# Altium PCB PCI_ASTROPIX_carrier.PcbDoc (part 1 of 2)
Units mil, origin at the board's own origin, x right, y up, seen from the top; angles counter-clockwise.
Board outline 2019.69 x 2347.68 mil, 4 copper layers (Top Layer, gnd, HV_vss, Bottom Layer); 70 components, 61 nets, 417 pads, 93 vias.
Unrouted connection lines stored in the file: 4.
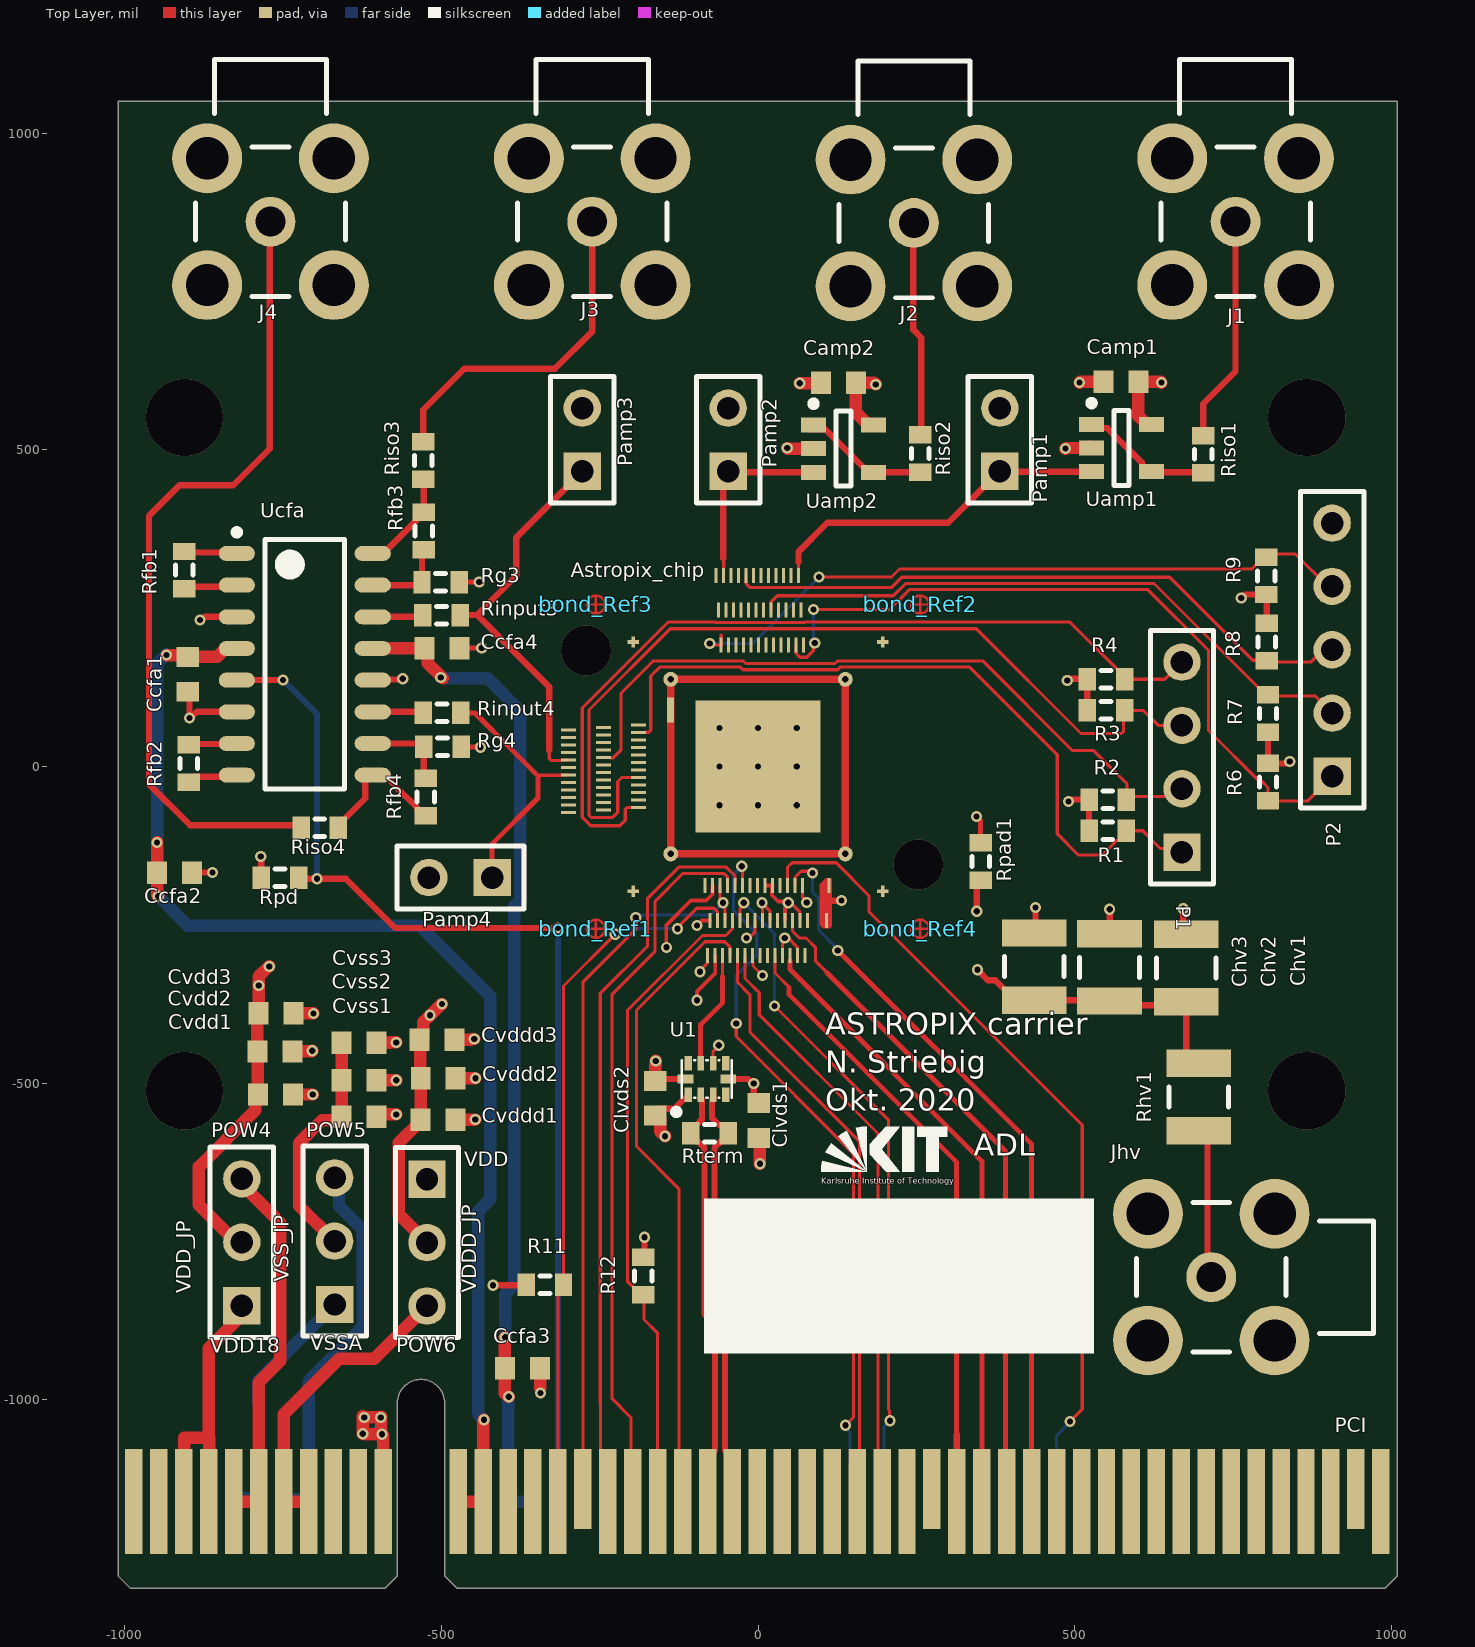
[diagram p0: Top Layer view]
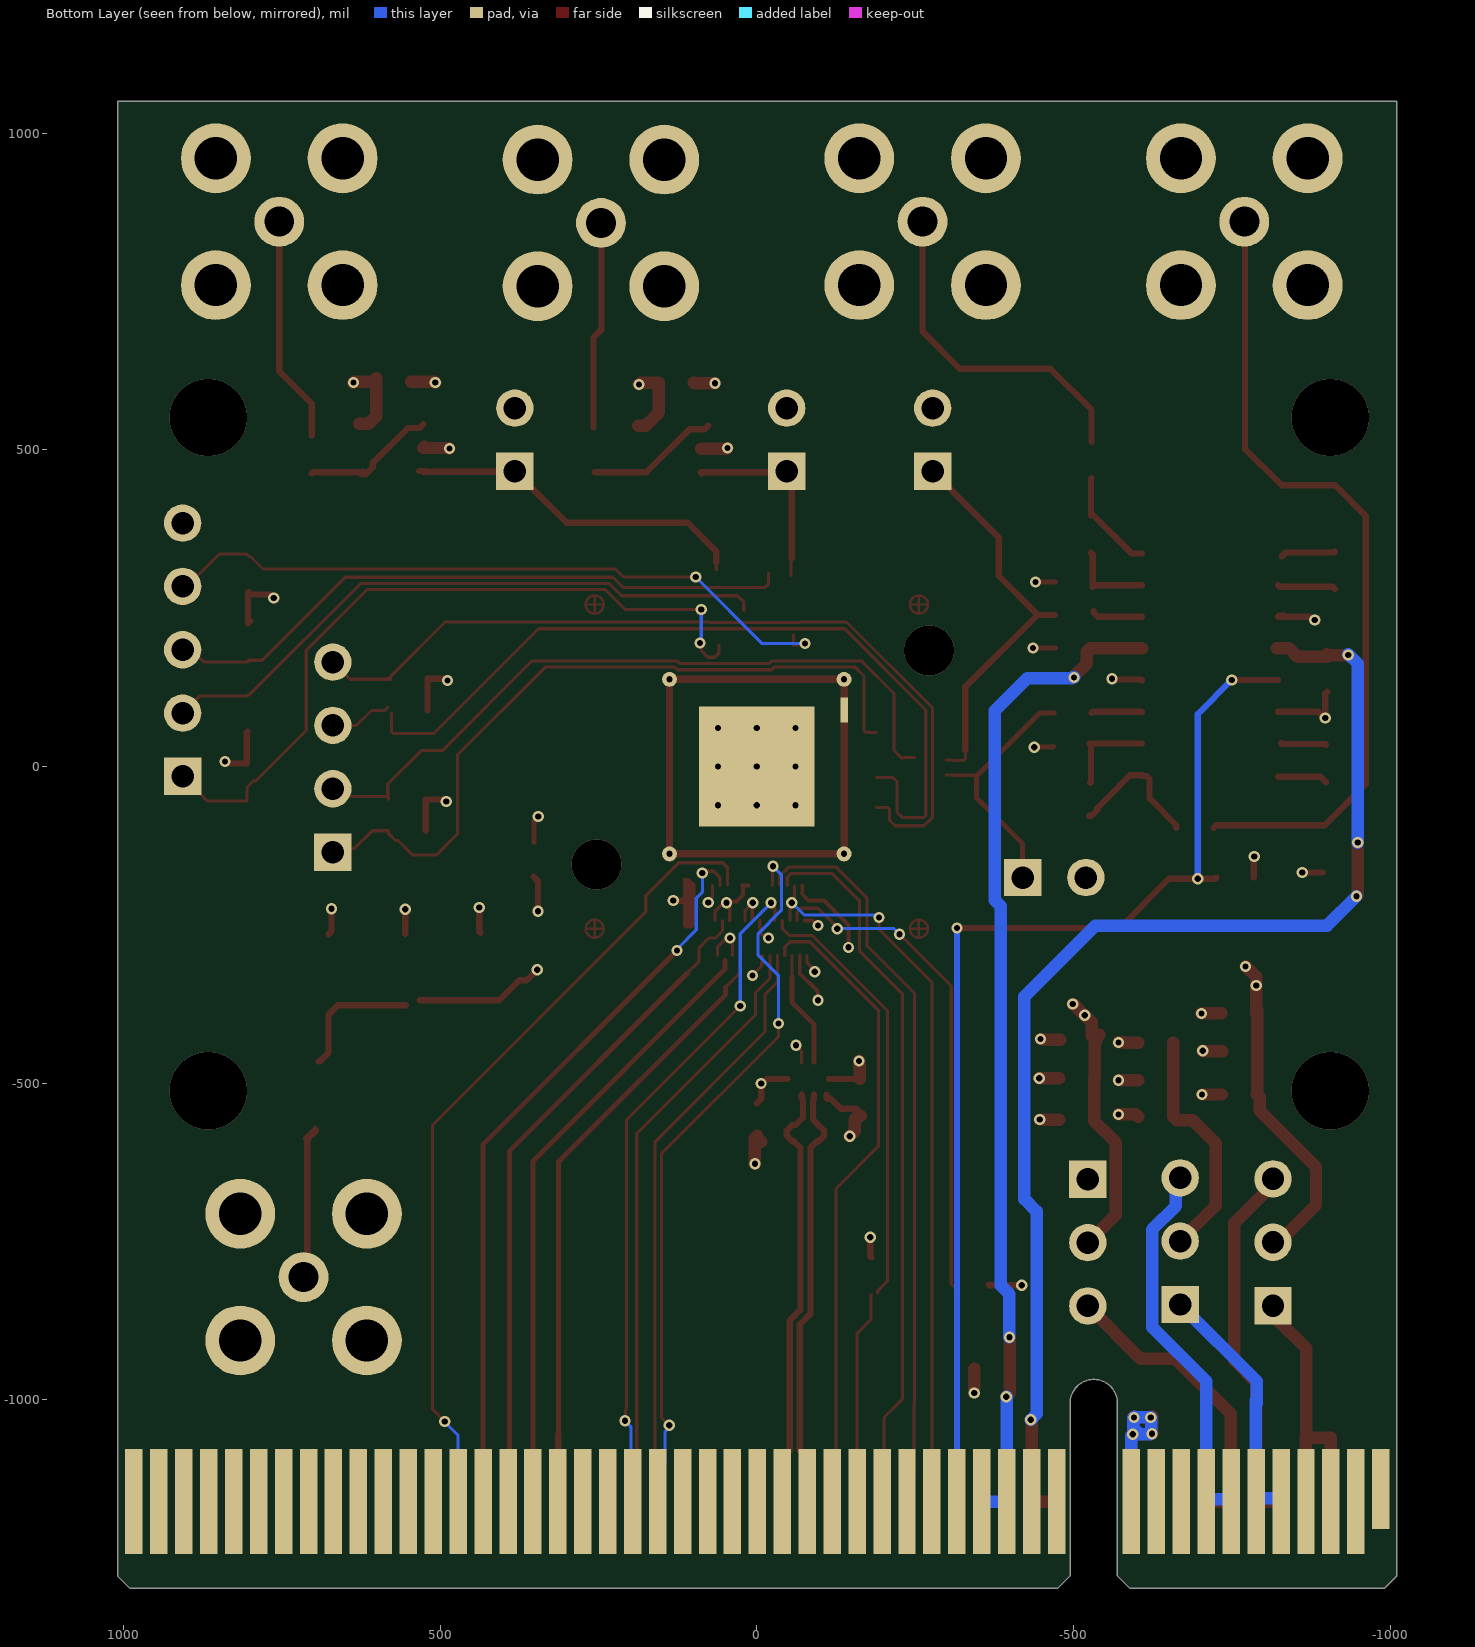
[diagram p1: Bottom Layer view, seen from below]
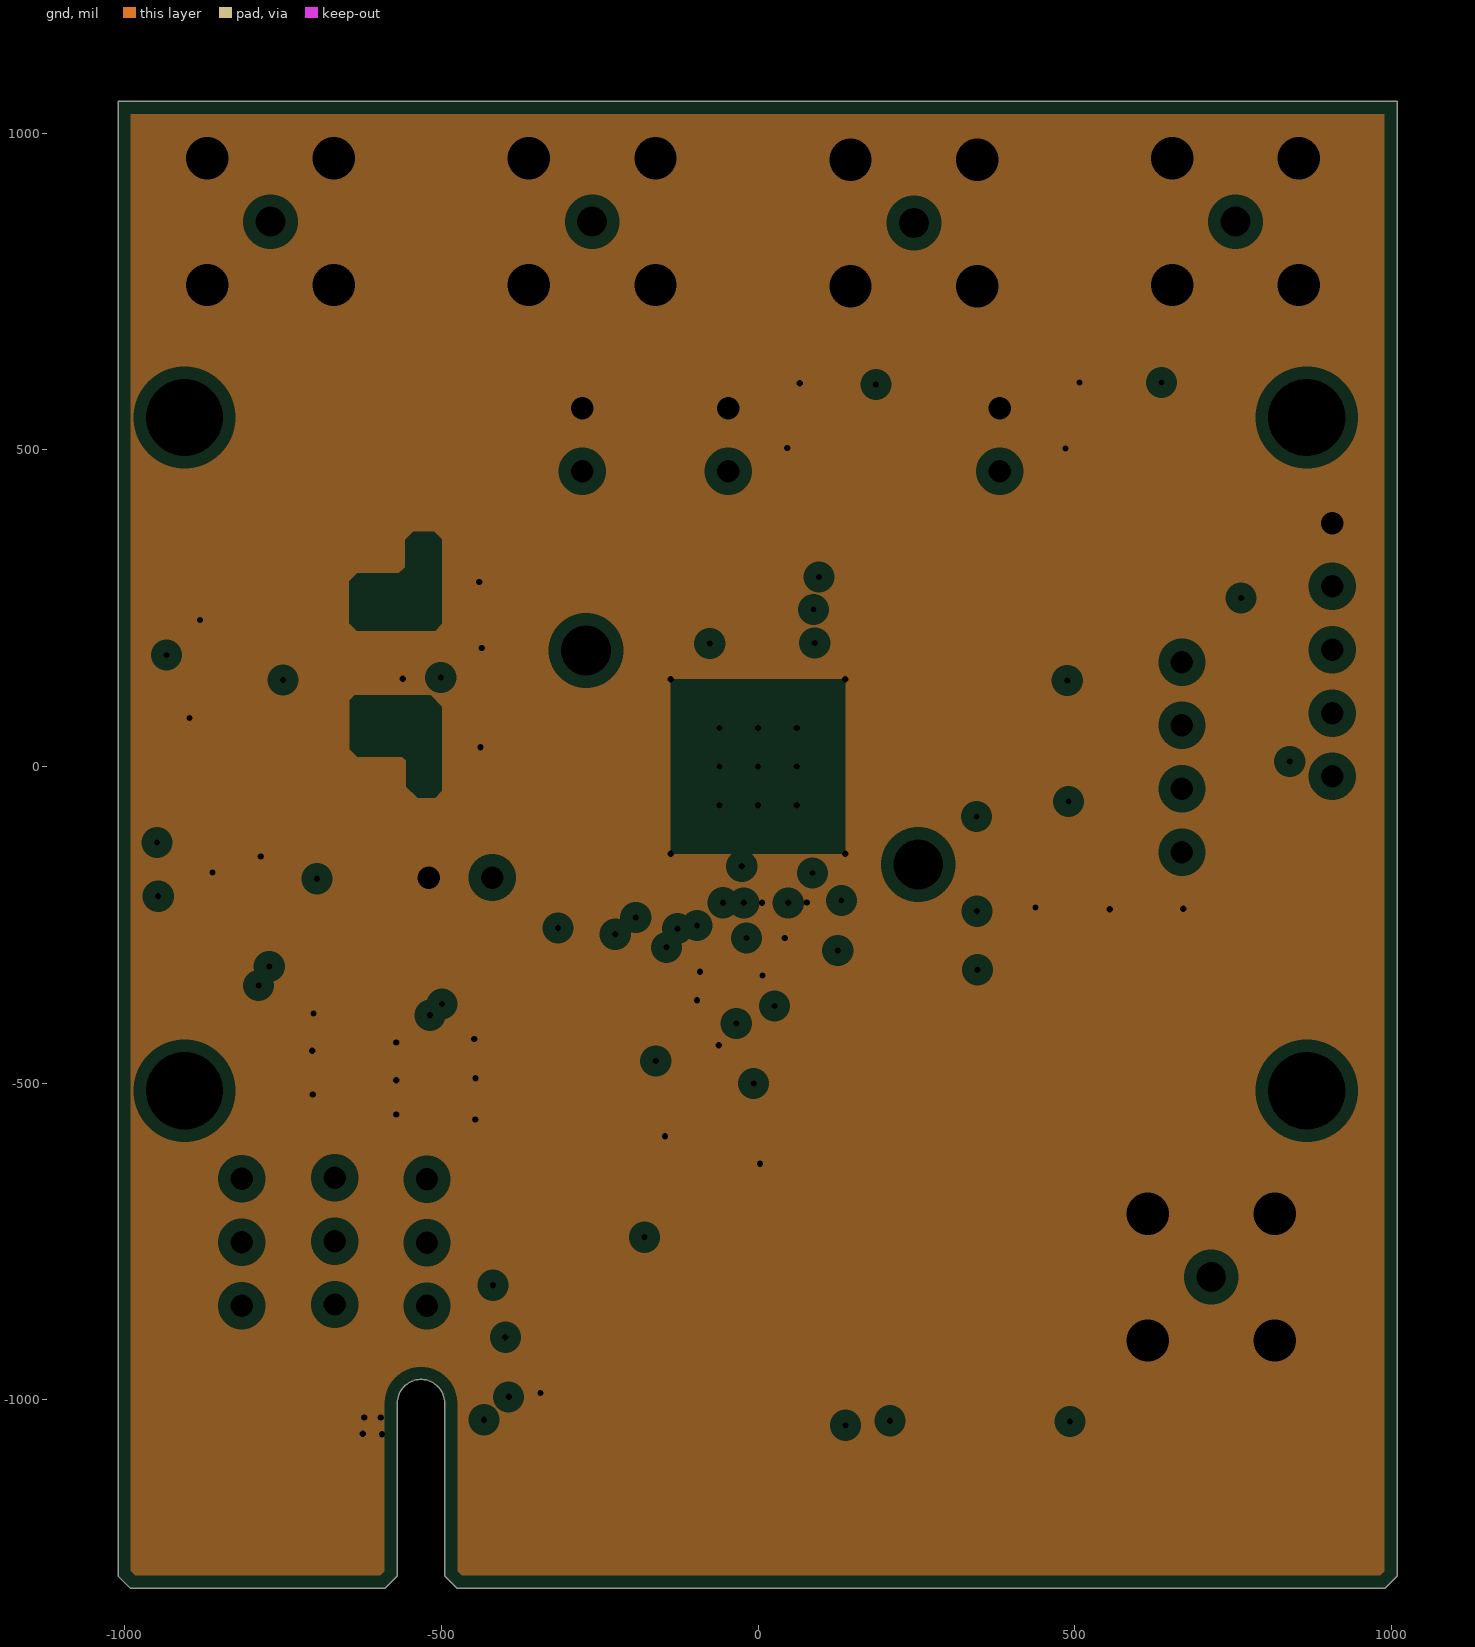
[diagram p2: gnd, clearances drawn from the general rule]
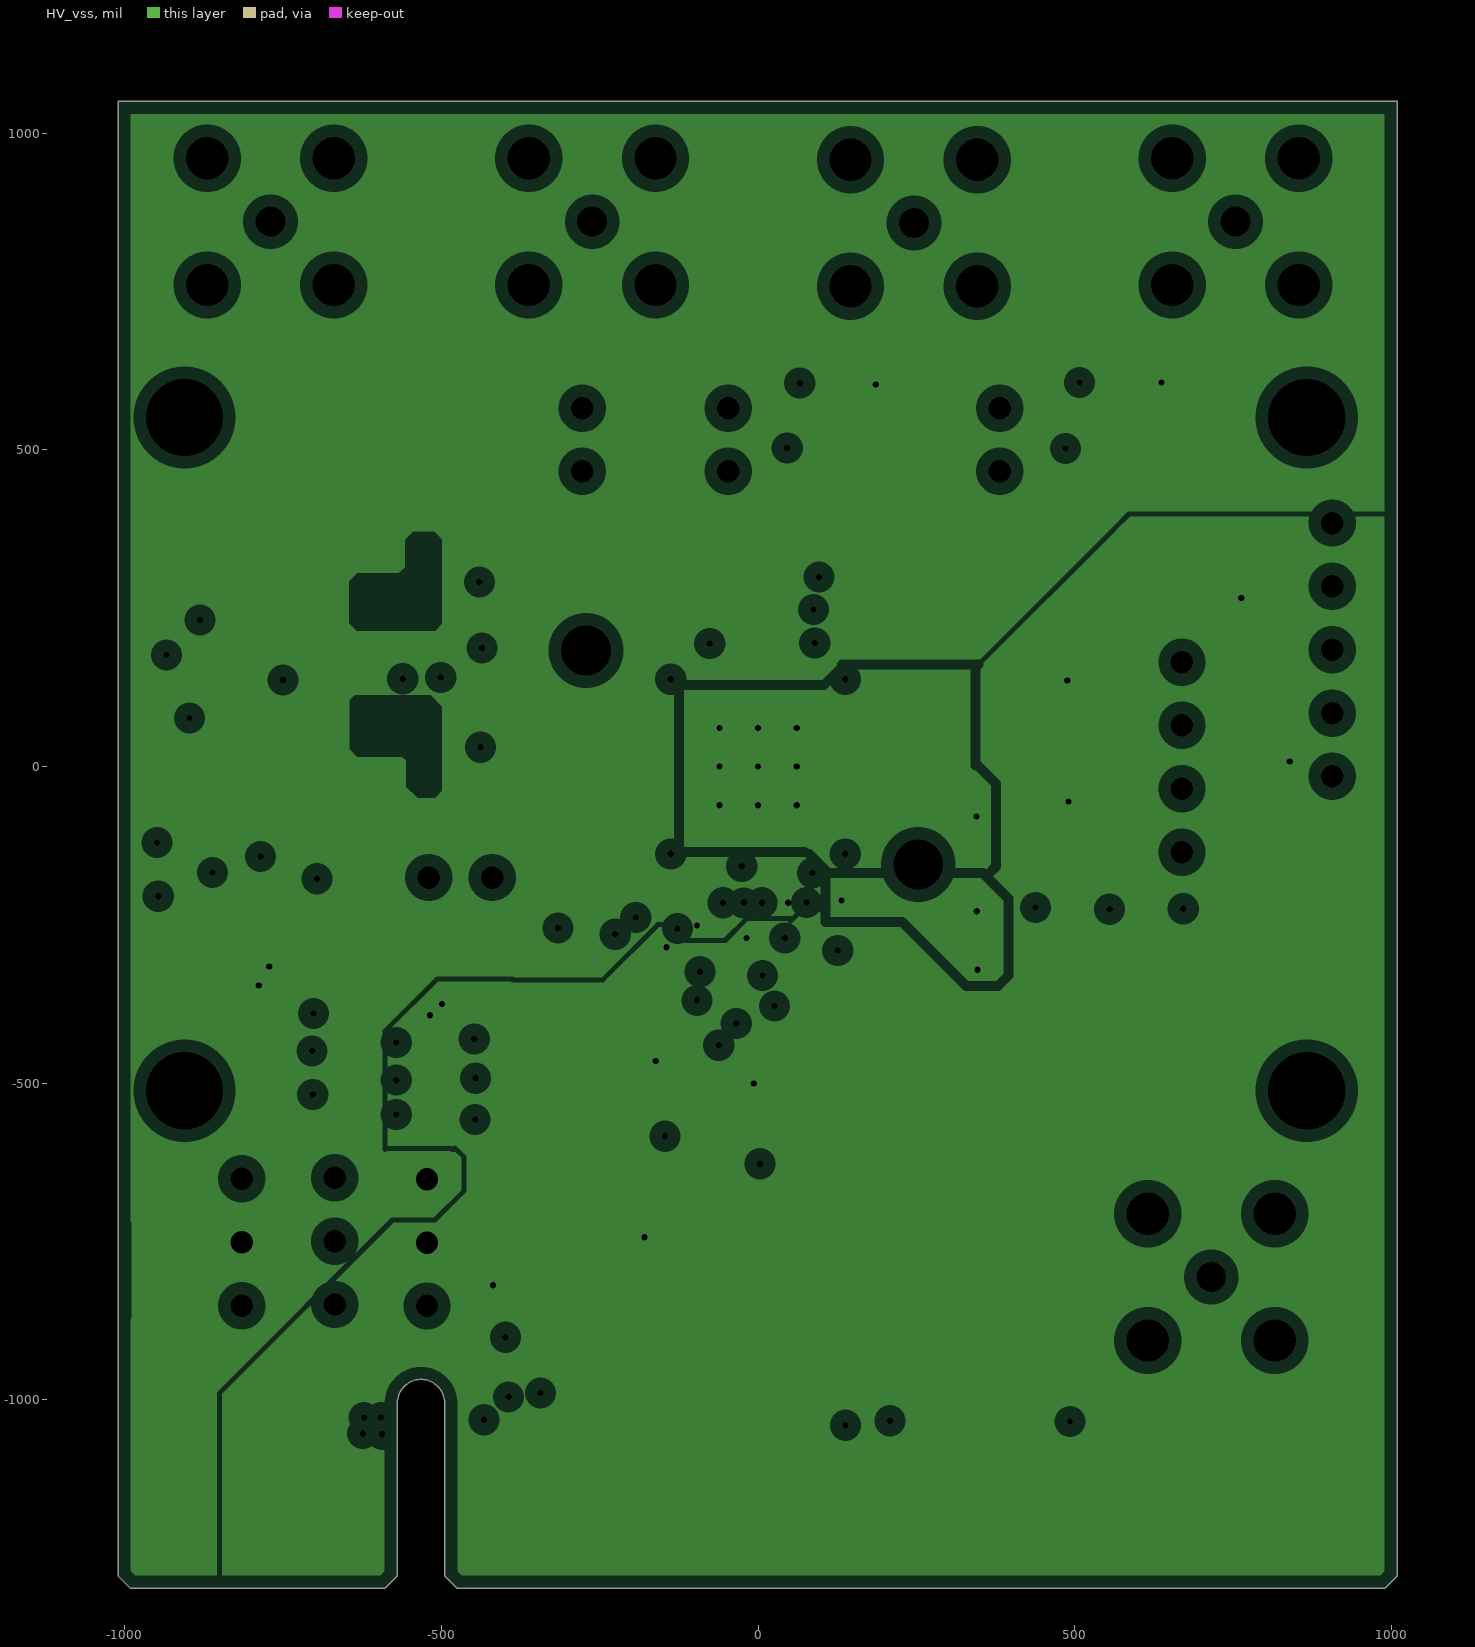
[diagram p3: HV_vss, clearances drawn from the general rule]

## Layer stack, top to bottom
Top Solder: solder mask 0.4, Solder Resist, Dk 3.5
Top Layer: signal copper 1.4
Dielectric 1: dielectric 12.6, FR-4, Dk 4.8
gnd: plane copper 1.4, net gnd
Dielectric2: dielectric 12.6, FR-4, Dk 4.8
HV_vss: plane copper 1.4, net (Multiple Nets)
Dielectric3: dielectric 12.6, FR-4, Dk 4.8
Bottom Layer: signal copper 1.4
Bottom Solder: solder mask 0.4, Solder Resist, Dk 3.5

## Board outline
-1010.43,-1277.8 -990.75,-1297.48 -589.17,-1297.48 -569.49,-1277.8 -569.49,-1005 cw(c-532.09,-1005) -494.69,-1005 -494.69,-1277.8 -475,-1297.48 989.57,-1297.48 1009.25,-1277.8 1009.25,-795.51 1009.25,1050.2 -1010.43,1050.2 -1010.43,-867.36

## Design rules (kind name [scope] priority, off if disabled: settings)
Clearance Clearance_hv [InNetClass('HV')] p1: gap=11.81 ignorepadtopadclearanceinfootprint=FALSE except(19.68: Arc-Arc Arc-Track Track-Track)
Clearance Clearance_differentnet [All] p2: gap=4.92 ignorepadtopadclearanceinfootprint=FALSE except(6.69: SMDPad-SMDPad SMDPad-THPad SMDPad-Via THPad-THPad THPad-Via Via-Via)
Clearance Clearance_samenet [All] p3: gap=4.92 ignorepadtopadclearanceinfootprint=FALSE except(0: Arc-Fill Arc-Poly Arc-Region Track-Fill Track-Poly Track-Region SMDPad-Fill SMDPad-Poly SMDPad-Region THPad-Fill THPad-Poly THPad-Region Via-Fill Via-Poly Via-Region Fill-Fill Fill-Poly Fill-Region Poly-Poly Poly-Region Region-Region; 6.69: SMDPad-SMDPad SMDPad-THPad SMDPad-Via THPad-THPad THPad-Via Via-Via)
ComponentClearance [All] p1: gap=0 collisioncheckmode=3 verticalgap=0 showdistances=FALSE
DiffPairsRouting [InDifferentialPairClass('Diffpair')] p1: maxlimit=7.87 minlimit=4.92 mostfreqgap=5.91 toplayer_minwidth=3.94 toplayer_maxwidth=11.81 toplayer_prefwidth=9.84 bottomlayer_minwidth=3.94 bottomlayer_maxwidth=11.81 bottomlayer_prefwidth=9.84 maxuncoupledlength=19.68
FabricationTestPointUsage FabricationTestPointUsage_1 [All] p1: valid=0 allowmultiple=FALSE
FabricationTestpoint FabricationTestpoint_1 [All] p1: side=3 testpointundercomponent=TRUE minsize=40 maxsize=100 preferedsize=60 minholesize=0 maxholesize=40 preferedholesize=32 testpointgrid=1 allowsidetop=TRUE allowsidebottom=TRUE usegrid=TRUE gridtolerance=0.01
HoleSize [All] p1: absolutevalues=TRUE maxlimit=236.22 minlimit=11.81 maxpercent=80.000 minpercent=20.000
HoleSize FabricationTestpoint [All] p2 off: absolutevalues=TRUE maxlimit=100 minlimit=1 maxpercent=80.000 minpercent=20.000
HoleSize FabricationTestPointUsage [All] p3 off: absolutevalues=TRUE maxlimit=100 minlimit=1 maxpercent=80.000 minpercent=20.000
MatchedLengths MatchedLengths_Within_diff [All] p1: tolerance=0.79 checknetsindiffpair=TRUE checkdiffpairvsdiffpair=FALSE checkxsignals=FALSE checkothers=FALSE
MatchedLengths MatchedLengths_all_diff [InDifferentialPairClass('FMC_LAxx')] p2: tolerance=3.94 checknetsindiffpair=FALSE checkdiffpairvsdiffpair=TRUE checkxsignals=TRUE checkothers=TRUE
MinimumAnnularRing [All] p1: minimumring=10
PlaneClearance [All] p1: clearance=19.68
PlaneConnect [All] p1: planeconnectstyle=Direct reliefexpansion=15.75 reliefentries=4 reliefconductorwidth=5.91 reliefairgap=5.91
PolygonConnect [All] p1: connectstyle=Relief reliefconductorwidth=5.91 reliefentries=4 polygonreliefangle="90 Angle" airgapwidth=10
RoomDefinition PCI_ASTROPIX_carrier [InComponentClass('PCI_ASTROPIX_carrier')] p1: confinementstyle=ConfineIn formatcopy=TRUE lockcomponents=FALSE outline 1054.28,-1241.61 3833.94,-1241.61 3833.94,-170.28 1054.28,-170.28
RoutingCorners [All] p1: cornerstyle=45-Degree minsetback=49.21 maxsetback=49.21
RoutingLayers [InNetClass('All Nets')] p1: top layer_v5=TRUE bottom layer_v5=TRUE
RoutingVias [All] p1: holewidth=9.84 width=17.72 viastyle="Through Hole" minholewidth=9.84 minwidth=17.72 maxholewidth=17.72 maxwidth=29.53
SilkToSilkClearance [All] p1 off: silktosilkclearance=10
SolderMaskExpansion [All] p1: expansion=2.95 istentingtop=FALSE
Width Width_Analog [InNetClass('Analog')] p1: maxlimit=10 minlimit=4.92 preferedwidth=7.87 minimp=50.000000 maximp=50.000000 favimp=50.000000
Width Width_Power [InNetClass('Power')] p2: maxlimit=393.7 minlimit=4.92 preferedwidth=9.84 minimp=50.000000 maximp=50.000000 favimp=50.000000
Width [InNetClass('All Nets')] p3: maxlimit=10 minlimit=4.92 preferedwidth=4.92
20 further rules are at their usual default settings.

## Classes and differential pairs
differential pair class Diffpair: SAMPLE_CLK
net class Power: gnd POW4 POW5 POW6 vcfa_neg vcfa_pos VDD18 vdd_board vddd_board vss_board VSSA
net class HV: NetAstropix_chip_201 sub_board
net class Analog: DAC_blpix DAC_VCasc2 DAC_Vminuspix DAC_Vth
differential pair SAMPLE_CLK: +SAMPLE_CLK_P -SAMPLE_CLK_N

## Components (designator, comment, footprint, x,y, rotation, side; value= is the part's Value field where it differs from the comment)
Astropix_chip "AstroPix_chip_full" "Astropix_Chip_w_bondpads_1mm_distance_125u _final" 0,0 r0 top locked
bond_Ref1 "AimStar" AimStar -255.91,-255.91 r90 top locked
bond_Ref2 "AimStar" AimStar 255.91,255.91 r90 top locked
bond_Ref3 "AimStar" AimStar -255.91,255.91 r90 top locked
bond_Ref4 "AimStar" AimStar 255.91,-255.91 r90 top locked
Camp1 "Cap Semi" 1608[0603] 572.83,607.29 r0 top value=100nF
Camp2 "Cap Semi" 1608[0603] 126.97,606.31 r0 top value=100nF
Ccfa1 "Cap Semi" 1608[0603] -900.59,145.67 r90 top value=4.7uF
Ccfa2 "Cap Semi" 1608[0603] -921.26,-167.32 r180 top value=100nF
Ccfa3 "Cap Semi" 1608[0603] -372.05,-949.8 r180 top value=4.7uF
Ccfa4 "Cap Semi" 1608[0603] -499.02,187.01 r180 top value=100nF
Chv1 "Cap Semi" C1210 676.18,-317.91 r270 top value=100nF
Chv2 "Cap Semi" C1210 555.12,-316.93 r270 top value=1nF
Chv3 "Cap Semi" C1210 436.02,-315.94 r270 top value=10pF
Clvds1 "Cap Semi" 1608[0603] 0.98,-559.06 r90 top value=100nF
Clvds2 "Cap Semi" 1608[0603] -162.41,-523.62 r90 top value=100nF
Cvdd1 "Cap Semi" 1608[0603] -761.81,-517.72 r180 top value=10uF
Cvdd2 "Cap Semi" 1608[0603] -762.8,-449.8 r180 top value=100nF
Cvdd3 "Cap Semi" 1608[0603] -760.83,-389.76 r180 top value=1nF
Cvddd1 "Cap Semi" 1608[0603] -505.44,-557.93 r180 top value=10uF
Cvddd2 "Cap Semi" 1608[0603] -504.92,-492.13 r180 top value=100nF
Cvddd3 "Cap Semi" 1608[0603] -506.89,-431.1 r180 top value=1nF
Cvss1 "Cap Semi" 1608[0603] -629.92,-553.15 r180 top value=10uF
Cvss2 "Cap Semi" 1608[0603] -629.92,-495.08 r180 top value=100nF
Cvss3 "Cap Semi" 1608[0603] -629.92,-436.02 r180 top value=1nF
J1 "COAX-F" MCX5.08-H5 753.94,860.24 r270 top
J2 "COAX-F" MCX5.08-H5 246.06,858.27 r270 top
J3 "COAX-F" MCX5.08-H5 -261.81,860.24 r270 top
J4 "COAX-F" MCX5.08-H5 -769.68,860.24 r270 top
Jhv "COAX-F" MCX5.08-H5 715.55,-806.1 r180 top
P1 "Header 4" HDR1X4 669.29,-135.04 r90 top
P2 "Header 5" HDR1X5 906.5,-15.55 r90 top
Pamp1 "Header 2" HDR1X2 381.89,465.94 r90 top
Pamp2 "Header 2" HDR1X2 -47.24,465.94 r90 top
Pamp3 "Header 2" HDR1X2 -277.56,465.94 r90 top
Pamp4 "Header 2" HDR1X2 -419.68,-175.2 r180 top
PCI "PCI_custom_98_GECCO" PCI_for_PCB_98 -39.8,-1145.43 r0 top
R1 "Res3" J1-0603 552.17,-101.38 r180 top value=100K
R2 "Res3" J1-0603 552.17,-52.17 r180 top value=100K
R3 "Res3" J1-0603 549.21,88.58 r180 top value=100K
R4 "Res3" J1-0603 549.21,137.8 r180 top value=100K
R6 "Res3" J1-0603 805.12,-24.61 r90 top value=100K
R7 "Res3" J1-0603 805.12,83.66 r270 top value=100K
R8 "Res3" J1-0603 803.15,196.85 r90 top value=100K
R9 "Res3" J1-0603 802.17,301.18 r270 top value=100K
R11 "Res3" J1-0603 -336.61,-817.91 r180 top value=10K
R12 "Res3" J1-0603 -181.1,-804.13 r90 top value=10K
Rfb1 "Res3" J1-0603 -905.51,310.04 r270 top value=1k
Rfb2 "Res3" J1-0603 -898.62,4.92 r90 top value=1k
Rfb3 "Res3" J1-0603 -527.56,372.05 r90 top value=1k
Rfb4 "Res3" J1-0603 -524.61,-48.23 r90 top value=1k
Rg3 "Res3" J1-0603 -500.98,291.34 r180 top value=493
Rg4 "Res3" J1-0603 -498.03,31.5 r180 top value=493
Rhv1 "Res3" 14-1210 695.87,-521.65 r270 top value=1k
Rinput3 "Res3" J1-0603 -500,239.17 r180 top value=1k
Rinput4 "Res3" J1-0603 -499.02,84.65 r180 top value=1k
Riso1 "Res3" J1-0603 702.76,493.11 r90 top value=47
Riso2 "Res3" J1-0603 255.91,494.09 r90 top value=47
Riso3 "Res3" J1-0603 -528.54,483.27 r90 top value=100
Riso4 "Res3" J1-0603 -691.93,-96.46 r180 top value=100
Rpad1 "Res3" J1-0603 351.38,-149.61 r90 top value=1K
Rpd "Res3" J1-0603 -754.92,-175.2 r180 top value=10k
Rterm "Res3" J1-0603 -76.77,-578.74 r180 top value=100
U1 "SN65LVDS4" SN65LVDS4RSER -80.71,-493.1 r0 top
Uamp1 "OPA320" SOT95P245X110-5N 573.82,502.95 r0 top
Uamp2 "OPA320" SOT95P245X110-5N 134.84,501.97 r0 top
Ucfa "AD8024" SOIC127P600X265-16N -715.55,161.42 r0 top
VDD_JP "Header 3" HDR1X3 -814.96,-850.98 r90 top
VDDD_JP "Header 3" HDR1X3 -522.64,-651.57 r270 top
VSS_JP "Header 3" HDR1X3 -668.47,-849.29 r90 top

## Footprints (in the part's own frame and the unit in brackets; to place one, negate y for a bottom-side part, rotate by r counter-clockwise, add the part's x,y. Pads: shape width x height; smd on the part's side, far side on the other; paste and mask are expansions set on the pad)
14-1210 [mm] "Chip Resistor, Body 3.2x2.5mm, IPC High Density"
  rect 1.1x2.6 smd: 1(-1.35,0) 2(1.35,0)
  silkscreen extent -0.4,-1.2 0.4,1.2, body extent -1.68,-1.32 1.68,1.32, height 0.9
1608[0603] [mm] "Chip Capacitor, Body 1.6x0.8mm, IPC High Density"
  rect 0.8x0.9 smd: 1(-0.7,0) 2(0.7,0)
  body extent -0.87,-0.48 0.87,0.48, height 1.3
AimStar [mil]
  Top Layer circle w3.94: c-0.14,0 r14.17
  Top Layer lines w3.94: -0.16,13.78 0,-13.78 ; -13.78,0 13.78,0
"Astropix_Chip_w_bondpads_1mm_distance_125u _final" [mm]
  rect 0.125x0.6 smd mask+0.075: 1(-2.12,-4.77) 2(-2.02,-7.57) 3(-1.92,-6.17) 4(-1.82,-4.77) 5(-1.72,-7.57) 6(-1.62,-6.17) 7(-1.52,-4.77) 8(-1.42,-7.57) 9(-1.32,-6.17) 10(-1.22,-4.77) 11(-1.12,-7.57) 12(-1.02,-6.17) 13(-0.92,-4.77) 14(-0.82,-7.57) 15(-0.72,-6.17) 16(-0.62,-4.77) 17(-0.52,-7.57) 18(-0.42,-6.17) 19(-0.32,-4.77) 20(-0.22,-7.57) 21(-0.12,-6.17) 22(-0.02,-4.77) 23(0.08,-7.57) 24(0.18,-6.17) 25(0.28,-4.77) 26(0.38,-7.57) 27(0.48,-6.17) 28(0.58,-4.77) 29(0.68,-7.57) 30(0.78,-6.17) 31(0.88,-4.77) 32(0.98,-7.57) 33(1.08,-6.17) 34(1.18,-4.77) 35(1.28,-7.57) 36(1.38,-6.17) 37(1.48,-4.77) 38(1.58,-7.57) 39(1.68,-6.17) 40(1.78,-4.77) 41(1.88,-7.57) 42(1.98,-6.17) 43(2.84,-4.77) 44(2.74,-6.17) 81(1.82,4.87) 82(1.72,6.27) 83(1.62,7.67) 84(1.52,4.87) 85(1.42,6.27) 86(1.32,7.67) 87(1.22,4.87) 88(1.12,6.27) 89(1.02,7.67) 90(0.92,4.87) 91(0.82,6.27) 92(0.72,7.67) 93(0.62,4.87) 94(0.52,6.27) 95(0.42,7.67) 96(0.32,4.87) 97(0.22,6.27) 98(0.12,7.67) 99(0.02,4.87) 100(-0.08,6.27) 101(-0.18,7.67) 102(-0.28,4.87) 103(-0.38,6.27) 104(-0.48,7.67) 105(-0.58,4.87) 106(-0.68,6.27) 107(-0.78,7.67) 108(-0.88,4.87) 109(-0.98,6.27) 110(-1.08,7.67) 111(-1.18,4.87) 112(-1.28,6.27) 113(-1.38,7.67) 114(-1.48,4.87) 115(-1.58,6.27) 116(-1.68,7.67)
  rect 0.3x1 all layers, no hole mask+0: 2(-3.51,2.27)
  rect 0.6x0.125 smd mask+0.075: 45(-7.6,-1.84) 46(-6.2,-1.74) 47(-4.8,-1.64) 48(-7.6,-1.54) 49(-6.2,-1.44) 50(-4.8,-1.34) 51(-7.6,-1.24) 52(-6.2,-1.14) 53(-4.8,-1.04) 54(-7.6,-0.94) 55(-6.2,-0.84) 56(-4.8,-0.74) 57(-7.6,-0.64) 58(-6.2,-0.54) 59(-4.8,-0.44) 60(-7.6,-0.34) 61(-6.2,-0.24) 62(-4.8,-0.14) 63(-7.6,-0.04) 64(-6.2,0.06) 65(-4.8,0.16) 66(-7.6,0.26) 67(-6.2,0.36) 68(-4.8,0.46) 69(-7.6,0.56) 70(-6.2,0.66) 71(-4.8,0.76) 72(-7.6,0.86) 73(-6.2,0.96) 74(-4.8,1.06) 75(-7.6,1.16) 76(-6.2,1.26) 77(-4.8,1.36) 78(-7.6,1.46) 79(-6.2,1.56) 80(-4.8,1.66)
  round 0.6 hole 0.25: 201(-1.55,-1.55) 201(-1.55,0) 201(-1.55,1.55) 201(0,-1.55) 201(0,0) 201(0,1.55) 201(1.55,-1.55) 201(1.55,0) 201(1.55,1.55) 202(-3.5,-3.5) 202(-3.5,3.5) 202(3.5,-3.5) 202(3.5,3.5)
  rect 4.63x4.82 smd far side: 201(0,0)
  rect 5x5.28 smd: 201(0,0)
  rect 0.15x0.45 smd: p(-5,-5) p(-5,5) p(5,-5) p(5,5)
  rect 0.45x0.15 smd: p(-5,-5) p(-5,5) p(5,-5) p(5,5)
  Top Layer lines w0.3: -3.5,-3.5 3.5,-3.5 3.5,3.5 -3.5,3.5 -3.5,-3.5
C1210 [mm] "Chip Capacitor, Body 3.2x2.5mm, IPC High Density"
  rect 1.1x2.6 smd: 1(-1.35,0) 2(1.35,0)
  silkscreen extent -0.4,-1.2 0.4,1.2, body extent -1.7,-1.35 1.7,1.35, height 1.3
HDR1X2 [mm] "Connector; Header; 2 Position"
  rect 1.5x1.5 hole 0.9: 1(0,0)
  round 1.5 hole 0.9: 2(2.54,0)
  silkscreen extent -1.27,-1.27 3.81,1.27
HDR1X3 [mm] "Connector; Header; 3 Position"
  rect 1.5x1.5 hole 0.9: 1(0,0)
  round 1.5 hole 0.9: 2(2.54,0) 3(5.08,0)
  silkscreen extent -1.27,-1.27 6.35,1.27
HDR1X4 [mm] "Connector; Header; 4 Position"
  rect 1.5x1.5 hole 0.9: 1(0,0)
  round 1.5 hole 0.9: 2(2.54,0) 3(5.08,0) 4(7.62,0)
  silkscreen extent -1.27,-1.27 8.89,1.27
HDR1X5 [mm] "Connector; Header; 5 Position"
  rect 1.5x1.5 hole 0.9: 1(0,0)
  round 1.5 hole 0.9: 2(2.54,0) 3(5.08,0) 4(7.62,0) 5(10.16,0)
  silkscreen extent -1.27,-1.27 11.43,1.27
J1-0603 [mm] "Chip Resistor, Body 1.6x0.8mm, IPC High Density"
  rect 0.7x0.9 smd: 1(-0.75,0) 2(0.75,0)
  silkscreen extent -0.2,-0.35 0.2,0.35, body extent -0.85,-0.48 0.85,0.48, height 0.9
MCX5.08-H5 [mm] "Connector; RF Coaxial, MCX, Thru-Hole; 5 Position; Right-Angle"
  round 2 hole 1.2: 1(0,0)
  round 2.8 hole 1.7: 2(-2.54,-2.54) 3(2.54,-2.54) 4(2.54,2.54) 5(-2.54,2.54)
  silkscreen extent -6.5,-3 3,3
PCI_for_PCB_98 [mm]
  rect 0.7x3.2 smd far side: A1(-24.014,0.119)
  rect 0.7x4.2 smd far side: A2(-23.014,-0.381) A3(-22.014,-0.381) A4(-21.014,-0.381) A5(-20.014,-0.381) A6(-19.014,-0.381) A7(-18.014,-0.381) A8(-17.014,-0.381) A9(-16.014,-0.381) A10(-15.014,-0.381) A11(-14.014,-0.381) A12(-11.014,-0.381) A13(-10.014,-0.381) A14(-9.014,-0.381) A15(-8.014,-0.381) A16(-7.014,-0.381) A17(-6.014,-0.381) A18(-5.014,-0.381) A19(-4.014,-0.381) A20(-3.014,-0.381) A21(-2.014,-0.381) A22(-1.014,-0.381) A23(-0.014,-0.381) A24(0.986,-0.381) A25(1.986,-0.381) A26(2.986,-0.381) A27(3.986,-0.381) A28(4.986,-0.381) A29(5.986,-0.381) A30(6.986,-0.381) A31(7.986,-0.381) A32(8.986,-0.381) A33(9.986,-0.381) A34(10.986,-0.381) A35(11.986,-0.381) A36(12.986,-0.381) A37(13.986,-0.381) A38(14.986,-0.381) A39(15.986,-0.381) A40(16.986,-0.381) A41(17.986,-0.381) A42(18.986,-0.381) A43(19.986,-0.381) A44(20.986,-0.381) A45(21.986,-0.381) A46(22.986,-0.381) A47(23.986,-0.381) A48(24.986,-0.381) A49(25.986,-0.381)
  rect 0.7x4.2 smd: B1(-24.014,-0.381) B2(-23.014,-0.381) B3(-22.014,-0.381) B4(-21.014,-0.381) B5(-20.014,-0.381) B6(-19.014,-0.381) B7(-18.014,-0.381) B8(-17.014,-0.381) B9(-16.014,-0.381) B10(-15.014,-0.381) B11(-14.014,-0.381) B12(-11.014,-0.381) B13(-10.014,-0.381) B14(-9.014,-0.381) B15(-8.014,-0.381) B16(-7.014,-0.381) B18(-5.014,-0.381) B19(-4.014,-0.381) B20(-3.014,-0.381) B21(-2.014,-0.381) B22(-1.014,-0.381) B23(-0.014,-0.381) B24(0.986,-0.381) B25(1.986,-0.381) B26(2.986,-0.381) B27(3.986,-0.381) B28(4.986,-0.381) B29(5.986,-0.381) B30(6.986,-0.381) B32(8.986,-0.381) B33(9.986,-0.381) B34(10.986,-0.381) B35(11.986,-0.381) B36(12.986,-0.381) B37(13.986,-0.381) B38(14.986,-0.381) B39(15.986,-0.381) B40(16.986,-0.381) B41(17.986,-0.381) B42(18.986,-0.381) B43(19.986,-0.381) B44(20.986,-0.381) B45(21.986,-0.381) B46(22.986,-0.381) B47(23.986,-0.381) B49(25.986,-0.381)
  rect 0.7x3.2 smd: B17(-6.014,0.119) B31(7.986,0.119) B48(24.986,0.119)
SN65LVDS4RSER [mm] "SN65LVDS4  1.8-V High-Speed  Differential  Line Receiver"
  rect 0.3x0.58 smd mask+0.05: 1(-0.75,-0.635) 4(0.75,-0.635) 6(0.75,0.635) 9(-0.75,0.635)
  rect 0.25x0.58 smd mask+0.05: 2(-0.25,-0.635) 3(0.25,-0.635) 7(0.25,0.635) 8(-0.25,0.635)
  rect 0.63x0.35 smd mask+0.05: 5(0.86,0) 10(-0.86,0)
  silkscreen extent -1.35,-1.45 1,0.75
SOIC127P600X265-16N [mm] "SOIC, 16-Leads, Body 9,90x3,90mm, Pitch 1,27mm, IPC Medium Density"
  oval 1.45x0.6 smd: 1(-2.725,4.445) 2(-2.725,3.175) 3(-2.725,1.905) 4(-2.725,0.635) 5(-2.725,-0.635) 6(-2.725,-1.905) 7(-2.725,-3.175) 8(-2.725,-4.445) 9(2.725,-4.445) 10(2.725,-3.175) 11(2.725,-1.905) 12(2.725,-0.635) 13(2.725,0.635) 14(2.725,1.905) 15(2.725,3.175) 16(2.725,4.445)
  silkscreen extent -2.85,-5 1.6,5.42, body extent -2,-5 2,5, height 2.65
SOT95P245X110-5N [mm] "SOT23, 5-Leads, Body 2,90x2,45mm, Pitch 0,95mm, IPC Medium Density"
  rect 1x0.6 smd: 1(-1.2,0.95) 2(-1.2,0) 3(-1.2,-0.95) 4(1.2,-0.95) 5(1.2,0.95)
  silkscreen extent -1.32,-1.5 0.3,1.92, body extent -0.7,-1.5 0.7,1.5, height 1.1

## Part data
Camp1 Camp2 Ccfa1 Ccfa2 Ccfa3 Ccfa4 Chv1 Chv2 Chv3 Clvds1 Clvds2 Cvdd1 Cvdd2 Cvdd3 Cvddd1 Cvddd2 Cvddd3 Cvss1 Cvss2 Cvss3: "Capacitor (Semiconductor SIM Model)", LatestRevisionDate=29-May-2009, LatestRevisionNote="IPC-7351 Footprint Added.", PackageDescription="Chip Capacitor", PackageReference=C1206, Published=8-Jun-2000, Publisher="Altium Limited"
J1 J2 J3 J4 Jhv: "RF Coaxial PCB Connector, MCX; Thru-Hole, Right-Angle Mount Socket, Blunt Post Terminal, 50 Ohm Impedance", PackageDocument=04-Jul-1999, ComponentLink1Description="Manufacturer Link", ComponentLink1URL=http://www.amphenolrf.com/, DatasheetDocument=30-May-2003, DrillSize="Corresponds to nominal value.", LatestRevisionDate=15-Jul-2004, LatestRevisionNote="Component Replaced.", PackageReference=919-119J-51AX, PCB_Layout="Complies with manufacturer's recommendation.", Published=15-Jul-2004, Publisher="Altium Limited"
P1: "Header, 4-Pin", LatestRevisionDate=17-Jul-2002, LatestRevisionNote="Re-released for DXP Platform.", Publisher="Altium Limited"
P2: "Header, 5-Pin", LatestRevisionDate=17-Jul-2002, LatestRevisionNote="Re-released for DXP Platform.", Publisher="Altium Limited"
Pamp1 Pamp2 Pamp3 Pamp4: "Header, 2-Pin", LatestRevisionDate=17-Jul-2002, LatestRevisionNote="Re-released for DXP Platform.", Publisher="Altium Limited"
R1 R2 R3 R4 R6 R7 R8 R9 R11 R12 Rfb1 Rfb2 Rfb3 Rfb4 Rg3 Rg4 Rhv1 Rinput3 Rinput4 Riso1 Riso2 Riso3 Riso4 Rpad1 Rpd Rterm: "Resistor", LatestRevisionDate=29-May-2009, LatestRevisionNote="IPC-7351 Footprint Added.", PackageDescription="Chip Resistor", PackageReference=J1-0603, Published=8-Jun-2000, Publisher="Altium Limited"
U1: "1.8-V High-Speed  Differential  Line Receiver"
VDD_JP VDDD_JP VSS_JP: "Header, 3-Pin", LatestRevisionDate=17-Jul-2002, LatestRevisionNote="Re-released for DXP Platform.", Publisher="Altium Limited"

## Via types
v1: diameter 17.72, hole 9.84, Top Layer to Bottom Layer, 87 vias
v2: diameter 122.05, hole 122.05, Top Layer to Bottom Layer, 4 vias
v3: diameter 78.74, hole 78.74, Top Layer to Bottom Layer, 2 vias

## Nets (pads, with @x,y where several pads share a name; then routed paths per layer and width w, separated by ;. In a path a pad name is that pad's centre, name@x,y a point inside that pad or via, vN(x,y) a via of type N, cw(c..) or ccw(c..) an arc to the next point about the centre after c; other vN are vias at no path point)
Amp1: Astropix_chip.83 Pamp1.1 Uamp1.3 | length 565.5
  Top Layer w4.92: Astropix_chip.83@63.98,310.04 63.98,321.92 66.86,324.8
  Top Layer w9.84: 63.98,322.83 63.98,339.57 109.25,384.84 300.2,384.84 356.69,441.34 357.28,441.34 376.97,461.02 Pamp1.1@376.97,467.52 ; Pamp1.1@378.94,463.58 380.91,465.55 Uamp1.3@526.57,465.55 ; Pamp1.1@391.73,474.41 Pamp1.1@393.7,472.44 ; Uamp1.3@521.65,466.54 Uamp1.3@533.46,466.54
Amp2: Astropix_chip.113 Pamp2.1 Uamp2.3 | length 304
  Top Layer w4.92: -55.12,328.74 -54.13,327.76 -54.13,312.95 -54.32,312.76 Astropix_chip.113@-54.32,301.97
  Top Layer w10: -55.12,328.74 -55.12,458.07 Pamp2.1@-47.24,465.94 -45.87,464.57 84.65,464.57 Uamp2.3@86.61,462.6 ; Uamp2.3@87.6,464.57 Uamp2.3@88.58,464.57
Amp3: Astropix_chip.66 Pamp3.1 Rinput3.1 | length 627.4
  Top Layer w4.92: -329.52,26.16 -329.52,12.73 -326.64,9.84 -310.4,9.84 -310,10.24 Astropix_chip.66@-299.21,10.24
  Top Layer w10: Rinput3.1@-470.47,239.17 -461.61,239.17 -443.9,239.17 -381.89,301.18 -381.89,361.61 Pamp3.1@-277.56,465.94 ; -442.91,239.17 -329.38,125.63 -329.38,26.31 -329.52,26.16
Amp4: Astropix_chip.60 Pamp4.1 Rinput4.1 | length 403.1
  Top Layer w4.92: -348.43,-13.78 -310.4,-13.78 -310,-13.39 Astropix_chip.60@-299.21,-13.39
  Top Layer w7.87: Rinput4.1@-469.49,84.65 -446.85,84.65 -388.78,26.57 -348.43,-13.78 -347.25,-14.95 -347.25,-49.56 -419.68,-122 Pamp4.1@-419.68,-175.2
DAC_blpix: Astropix_chip.29 PCI.B32 | length 969.8
  Top Layer w4.92: Astropix_chip.29@26.77,-298.03 26.77,-325.98 49.21,-348.43
  Top Layer w7.87: 49.21,-348.43 49.21,-360.24 312.99,-624.02 312.99,-1053.98 313.56,-1054.55
  Top Layer w10: PCI.B32@313.56,-1149.04 313.56,-1054.55
DAC_VCasc2: Astropix_chip.35 PCI.B33 | length 941.6
  Top Layer w7.87: Astropix_chip.35@50.39,-305.91 50.39,-320.07 353.35,-623.03 PCI.B33@353.35,-1122.05
DAC_Vminuspix: Astropix_chip.37 PCI.B35 | length 1189.4
  Top Layer w4.92: Astropix_chip.37@58.27,-187.8 58.27,-174.89 67.81,-165.35 75.81,-165.35 v1@84.65,-165.35 ; v1(85.96,-168.11) 84.65,-166.8 v1@84.65,-165.35 ; v1@91.8,-165.35 v1@84.65,-165.35
  Top Layer w7.87: v1(125.98,-290.35) 432.09,-596.46 PCI.B35@432.09,-1160.43
  Bottom Layer w4.92: v1(85.96,-168.11) 85.96,-198.16 95.47,-207.68 95.47,-257.87 125.98,-288.39 v1(125.98,-290.35)
DAC_Vth: Astropix_chip.36 PCI.B34 | length 1062.3
  Top Layer w4.92: Astropix_chip.36@54.32,-242.91 54.32,-259.75 65.16,-270.59 75.7,-270.59 91.04,-285.93 91.04,-307.58 109.25,-325.79
  Top Layer w7.87: 109.25,-325.79 390.75,-607.28 390.75,-1155.51 PCI.B34@393.7,-1158.46
Disable_cfa: PCI.A16 Rpd.1 Ucfa.5 | length 1757.3
  Top Layer w9.84: Ucfa.5@-822.83,136.42 -822.64,136.61 -750.2,136.61 v1(-750,136.81) ; Rpd.1@-725.39,-175.2 -723.43,-177.17 v1(-696.06,-177.17) -650.59,-177.17 -572.83,-254.92 v1(-315.94,-254.92)
  Bottom Layer w9.84: v1(-750,136.81) -696.06,82.87 v1(-696.06,-177.17) ; PCI.A16@-315.94,-1160.43 v1(-315.94,-254.92)
gnd: Astropix_chip.2 Astropix_chip.5 Astropix_chip.20 Astropix_chip.24 Astropix_chip.27 Astropix_chip.32 Astropix_chip.38 Astropix_chip.40 Astropix_chip.202 Camp1.1 Camp2.1 Ccfa1.1 Ccfa2.1 Ccfa3.1 Ccfa4.1 Chv1.1 Chv2.1 Chv3.1 Clvds1.1 Clvds2.1 Cvdd1.1 Cvdd2.1 Cvdd3.1 Cvddd1.1 Cvddd2.1 Cvddd3.1 Cvss1.1 Cvss2.1 Cvss3.1 J1.2 J1.3 J1.4 J1.5 J2.2 J2.3 J2.4 J2.5 J3.2 J3.3 J3.4 J3.5 J4.2 J4.3 J4.4 J4.5 Jhv.2 Jhv.3 Jhv.4 Jhv.5 P2.5 Pamp1.2 Pamp2.2 Pamp3.2 Pamp4.2 PCI.A11 PCI.B11 Rg3.1 Rg4.1 Rpd.2 U1.1 U1.7 Uamp1.2 Uamp2.2 Ucfa.3 Ucfa.6 Ucfa.12 | length 1952.3
  Top Layer w4.92: v1(-91.54,-323.82) -91.54,-321.85 -79.53,-309.84 Astropix_chip.2@-79.53,-298.03 ; U1.7@-70.87,-468.1 -70.87,-449.3 -62.01,-440.44 v1(-62.01,-439.96) ; Astropix_chip.20@-8.66,-298.03 -8.66,-308.82 -7.87,-309.61 -7.87,-314.96 v1(6.89,-329.72) ; v1@5.91,-213.58 v1@5.91,-211.13 ; v1(6.42,-215.11) v1@7.08,-215.77 ; v1@6.89,-213.58 7.08,-213.77 v1@7.08,-215.11 ; Astropix_chip.24@7.08,-242.91 v1@7.08,-215.77 ; Astropix_chip.27@18.7,-244.09 18.7,-227.39 v1@7.08,-215.77 ; Astropix_chip.32@38.58,-298.03 38.58,-287.24 38.58,-277.92 v1@45.19,-271.31 ; v1@46.75,-269.68 62.2,-285.14 Astropix_chip.38@62.2,-298.03 ; Astropix_chip.40@70.08,-187.8 70.08,-205.77 76.77,-212.46 v1(76.77,-214.57)
  Top Layer w5.91: v1(-96.46,-369.09) -96.46,-355.31 -67.72,-326.57 Astropix_chip.5@-67.72,-298.03
  Top Layer w7.87: Ccfa4.1@-471.46,187.01 v1(-436.02,187.01) ; Rg3.1@-471.46,291.34 v1(-439.96,291.34) ; Rg4.1@-468.5,31.5 -467.52,30.51 v1(-437.99,30.51) ; Ccfa3.1@-344.49,-949.8 Ccfa3.1@-343.5,-950.79
  Top Layer w9.84: v1@-900.59,75.79 -896.49,75.79 -885.86,86.42 Ucfa.6@-822.83,86.42 ; Ccfa1.1@-900.59,118.11 -897.64,115.16 v1(-897.64,76.77) ; Ccfa2.1@-893.7,-167.32 -861.31,-167.32 v1(-861.2,-167.44) ; v1(-880.91,231.3) -878.77,231.3 -873.66,236.42 Ucfa.3@-829.92,236.42 ; Ucfa.3@-830.71,239.17 -828.25,236.71 Ucfa.3@-827.95,236.42 ; Ucfa.3@-829.72,236.22 Ucfa.3@-829.92,236.42 ; Ucfa.3@-825.79,238.19 -824.61,238.19 Ucfa.3@-822.83,236.42 Ucfa.3@-827.95,236.42 ; v1(-785.23,-141.93) -785.23,-142.3 -784.45,-143.08 Rpd.2@-784.45,-175.2 ; Ucfa.12@-608.27,136.42 -607.09,137.6 -562.2,137.6 v1(-561.02,138.78) ; Clvds2.1@-159.45,-542.32 -157.48,-540.35 -132.49,-540.35 -116.73,-524.6 -111.22,-524.6 -110.24,-523.61 U1.1@-110.24,-518.1 ; Chv3.1@436.02,-262.8 437.99,-260.83 v1(437.99,-222.44) ; Chv2.1@555.12,-263.78 v1(555.12,-225.39) ; v1(671.26,-224.41) 671.26,-259.84 Chv1.1@676.18,-264.76 ; Ucfa.3@-829.92,236.42 Ucfa.3@-827.95,236.42
  Top Layer w19.68: Cvdd2.1@-735.24,-449.8 -704.92,-449.8 v1(-703.94,-448.82) ; Cvdd1.1@-734.25,-517.72 v1(-702.95,-517.72) ; Cvdd3.1@-733.27,-389.76 v1(-701.97,-389.76) ; v1(-624.02,-1053.15) v1@-624.02,-1025.59 ; v1@-623.03,-1053.15 -622.05,-1054.13 v1@-594.49,-1054.13 ; v1(-621.83,-1027.47) -595.39,-1027.47 v1@-594.49,-1026.57 ; Cvss1.1@-602.36,-553.15 -598.43,-549.21 v1(-571.06,-549.21) ; Cvss2.1@-602.36,-495.08 v1(-571.06,-495.08) ; Cvss3.1@-602.36,-436.02 -581.1,-436.02 -580.54,-435.46 v1(-571.06,-435.46) ; v1(-595.47,-1027.56) -594.49,-1028.54 v1@-594.49,-1054.13 ; v1@-594.49,-1055.12 v1@-594.49,-1054.13 ; PCI.B11@-591.54,-1160.43 -591.54,-1056.1 v1(-593.5,-1054.13) v1@-594.49,-1054.13 ; Cvddd3.1@-479.33,-431.1 -453.74,-431.1 -452.76,-430.12 v1(-448.03,-430.12) ; Cvddd1.1@-477.89,-557.93 -447.34,-557.93 v1(-446.59,-557.17) ; Cvddd2.1@-477.36,-492.13 v1(-446.06,-492.13) ; v1@-343.5,-981.3 Ccfa3.1@-343.5,-950.79 ; Clvds2.1@-164.37,-551.18 Clvds2.1@-162.41,-551.18 ; Clvds2.1@-156.51,-557.09 Clvds2.1@-162.41,-551.18 ; v1(-146.65,-583.66) -154.54,-575.78 -154.54,-557.09 -160.44,-551.18 Clvds2.1@-162.41,-551.18 ; Clvds1.1@-6.89,-592.52 -0.98,-586.61 Clvds1.1@0.98,-586.61 ; Clvds1.1@-0.98,-582.68 2.92,-586.59 v1(2.92,-626.94) ; v1(46.26,502.95) 47.24,501.97 Uamp2.2@87.6,501.97 ; v1(65.94,605.31) 98.41,605.31 Camp2.1@99.41,606.31 ; v1(485.24,501.97) 486.22,502.95 Uamp1.2@526.57,502.95 Uamp1.2@524.61,504.92 ; v1(507.57,606.19) 508.67,607.29 Camp1.1@545.28,607.29
  Bottom Layer w19.68: v1@-623.03,-1053.15 -623.03,-1028.68 v1(-621.83,-1027.47) -597.35,-1027.47 v1@-596.46,-1026.57 ; v1@-621.06,-1053.15 -620.08,-1054.13 v1@-594.49,-1054.13 ; v1@-600.06,-1049.55 v1@-599.08,-1048.56 ; v1(-595.47,-1027.56) -594.49,-1028.54 v1@-594.49,-1054.13 ; v1@-594.49,-1058.07 v1@-594.49,-1054.13 ; v1(-593.5,-1054.13) -591.54,-1056.1 PCI.A11@-591.54,-1160.43
  other v1: -343.5,-989.17 42.32,-270.71
Inj: Astropix_chip.34 PCI.A36 | length 1291.7
  Top Layer w4.92: Astropix_chip.34@46.46,-187.01 46.46,-177 46.46,-158.99 53.58,-151.87 123.33,-151.87 175.2,-203.74 175.2,-229.33 511.81,-565.94 511.81,-1014.76 v1@493.11,-1033.46
  Bottom Layer w4.92: PCI.A36@471.46,-1160.43 471.46,-1056.1 v1@492.13,-1035.43
  other v1: 492.64,-1033.82
interrupt: Astropix_chip.6 PCI.B16 R11.1 | length 1129.9
  Top Layer w4.92: PCI.B16@-315.94,-1160.43 -315.94,-825.79 R11.1@-307.09,-816.93 ; R11.1@-307.09,-817.91 R11.1@-307.09,-816.93 ; v1(-225.39,-264.76) -307.09,-346.46 R11.1@-307.09,-816.93 ; v1(-126.97,-255.91) -126.97,-253.94 -96.75,-223.72 -69.59,-223.72 -63.78,-229.53 Astropix_chip.6@-63.78,-243.11
  Bottom Layer w4.92: v1(-225.39,-264.76) -216.54,-255.91 v1(-126.97,-255.91)
NetAstropix_chip_47: Astropix_chip.47 P1.4 R4.1 | length 1343.5
  Top Layer w4.92: Astropix_chip.47@-188.98,-64.57 -206.76,-64.57 -209.65,-67.45 -209.65,-84.86 -218.29,-93.5 -263.92,-93.5 -277.56,-79.86 -277.56,92.52 -141.73,228.35 -68.41,228.35 -67.72,227.66 73.24,227.66 73.93,228.35 492.12,228.35 578.74,141.73 R4.1@578.74,137.79 642.12,137.79 P1.4@669.29,164.96
NetAstropix_chip_59: Astropix_chip.59 P1.3 R3.1 | length 1394.4
  Top Layer w4.92: Astropix_chip.59@-188.98,-17.33 -215.16,-17.33 -221.46,-23.62 -221.46,-71.85 -230.32,-80.71 -262.8,-80.71 -266.73,-76.77 -266.73,89.43 -138.64,217.52 344.49,217.52 509.84,52.17 573.89,52.17 576.77,55.05 R3.1@576.77,84.65 ; R3.1@582.68,93.5 587.6,88.58 608.27,88.58 631.89,64.96 P1.3@669.29,64.96
NetAstropix_chip_67: Astropix_chip.67 P1.2 R2.1 | length 1142.6
  Top Layer w4.92: Astropix_chip.67@-248.88,14.17 -233.3,14.17 -232.91,13.78 -228.35,13.78 -216.54,25.59 -216.54,115.37 -165.07,166.83 -23.79,166.83 -19.65,162.7 121.63,162.7 125.77,166.83 354.82,166.83 496.43,25.22 529.9,25.22 582.68,-27.56 R2.1@582.68,-47.24 ; R2.1@581.69,-52.17 581.69,-48.23 R2.1@582.68,-47.24 ; P1.2@663.88,-35.93 653.76,-35.93 642.44,-47.24 R2.1@582.68,-47.24
NetAstropix_chip_77: Astropix_chip.77 P1.1 R1.1 | length 1186.4
  Top Layer w4.92: Astropix_chip.77@-188.98,53.54 -178.18,53.54 -177.59,54.13 -172.17,54.13 -169.29,57.02 -169.29,143.08 -155.38,156.99 -27.86,156.99 -23.73,152.85 125.71,152.85 129.85,156.99 334.15,156.99 472.44,18.7 472.44,-106.3 505.91,-139.76 543.31,-139.76 566.44,-116.63 570.37,-116.63 581.69,-105.32 R1.1@581.69,-101.38 607.28,-101.38 635.26,-129.36 662.82,-129.36 P1.1@671.26,-137.8
NetAstropix_chip_84: Astropix_chip.84 P2.1 R6.1 | length 1188.1
  Top Layer w4.92: Astropix_chip.84@59.85,191.73 59.85,178.83 66.14,172.54 77.18,172.54 87.22,182.58 87.22,193.52 v1@89.57,195.87 ; v1(87.6,248.03) 207.68,248.03 238.93,279.29 615.4,279.29 711.22,183.47 711.22,56.89 790.55,-22.44 794.59,-22.44 805.12,-32.97 R6.1@805.12,-54.13 867.91,-54.13 P2.1@906.5,-15.55
  Bottom Layer w4.92: v1(87.6,248.03) 87.6,196.3 88.83,195.07 v1(89.67,195.07)
NetAstropix_chip_94: Astropix_chip.94 P2.2 R7.1 | length 995.1
  Top Layer w4.92: Astropix_chip.94@20.47,246.85 20.47,257.64 20.67,257.84 20.67,259.95 28.97,268.24 30.41,269.68 213.58,269.68 233.03,289.13 625.24,289.13 801.18,113.19 R7.1@805.12,113.19 ; R7.1@805.12,111.22 879.72,111.22 881.17,109.78 P2.2@906.5,84.45
NetAstropix_chip_104: Astropix_chip.104 P2.3 R8.1 | length 1013.1
  Top Layer w4.92: Astropix_chip.104@-18.7,305.12 -18.7,288.88 -12.3,282.48 210.49,282.48 226.98,298.97 649.84,298.97 780.93,167.89 R8.1@802.17,167.89 ; R8.1@802.17,165.35 873.39,165.35 892.49,184.45 P2.3@906.5,184.45
NetAstropix_chip_114: Astropix_chip.114 P2.4 R9.1 | length 1096.6
  Top Layer w4.92: v1(-76.27,194.11) -69.77,194.11 -67.4,191.73 Astropix_chip.114@-58.26,191.73 ; Astropix_chip.114@-58.07,190.94 -58.07,207.68 ; v1(96.46,299.21) 210.63,299.21 223.43,312.01 779.53,312.01 R9.1@799.21,331.69 ; R9.1@801.18,331.69 805.12,335.63 848.43,335.63 899.61,284.45 P2.4@906.5,284.45
  Bottom Layer w4.92: v1@-75.79,195.87 -74.03,194.11 -8.65,194.11 v1(96.46,299.21)
NetAstropix_chip_201: Astropix_chip.201 Rpad1.2 | length 43.7
  Top Layer w4.92: v1(345.08,-79.02) 351.38,-85.32
  Top Layer w7.87: Rpad1.2@351.38,-120.08 351.38,-85.32